# Altium PCB first_test.PcbDoc (part 4 of 5)
Units mil, origin at the board's own origin, x right, y up, seen from the top; angles counter-clockwise.
Board outline 3440.59 x 3087.6 mil, 4 copper layers (Top Layer, GND, VCC, Bottom Layer); 175 components, 91 nets, 2807 pads, 1128 vias.
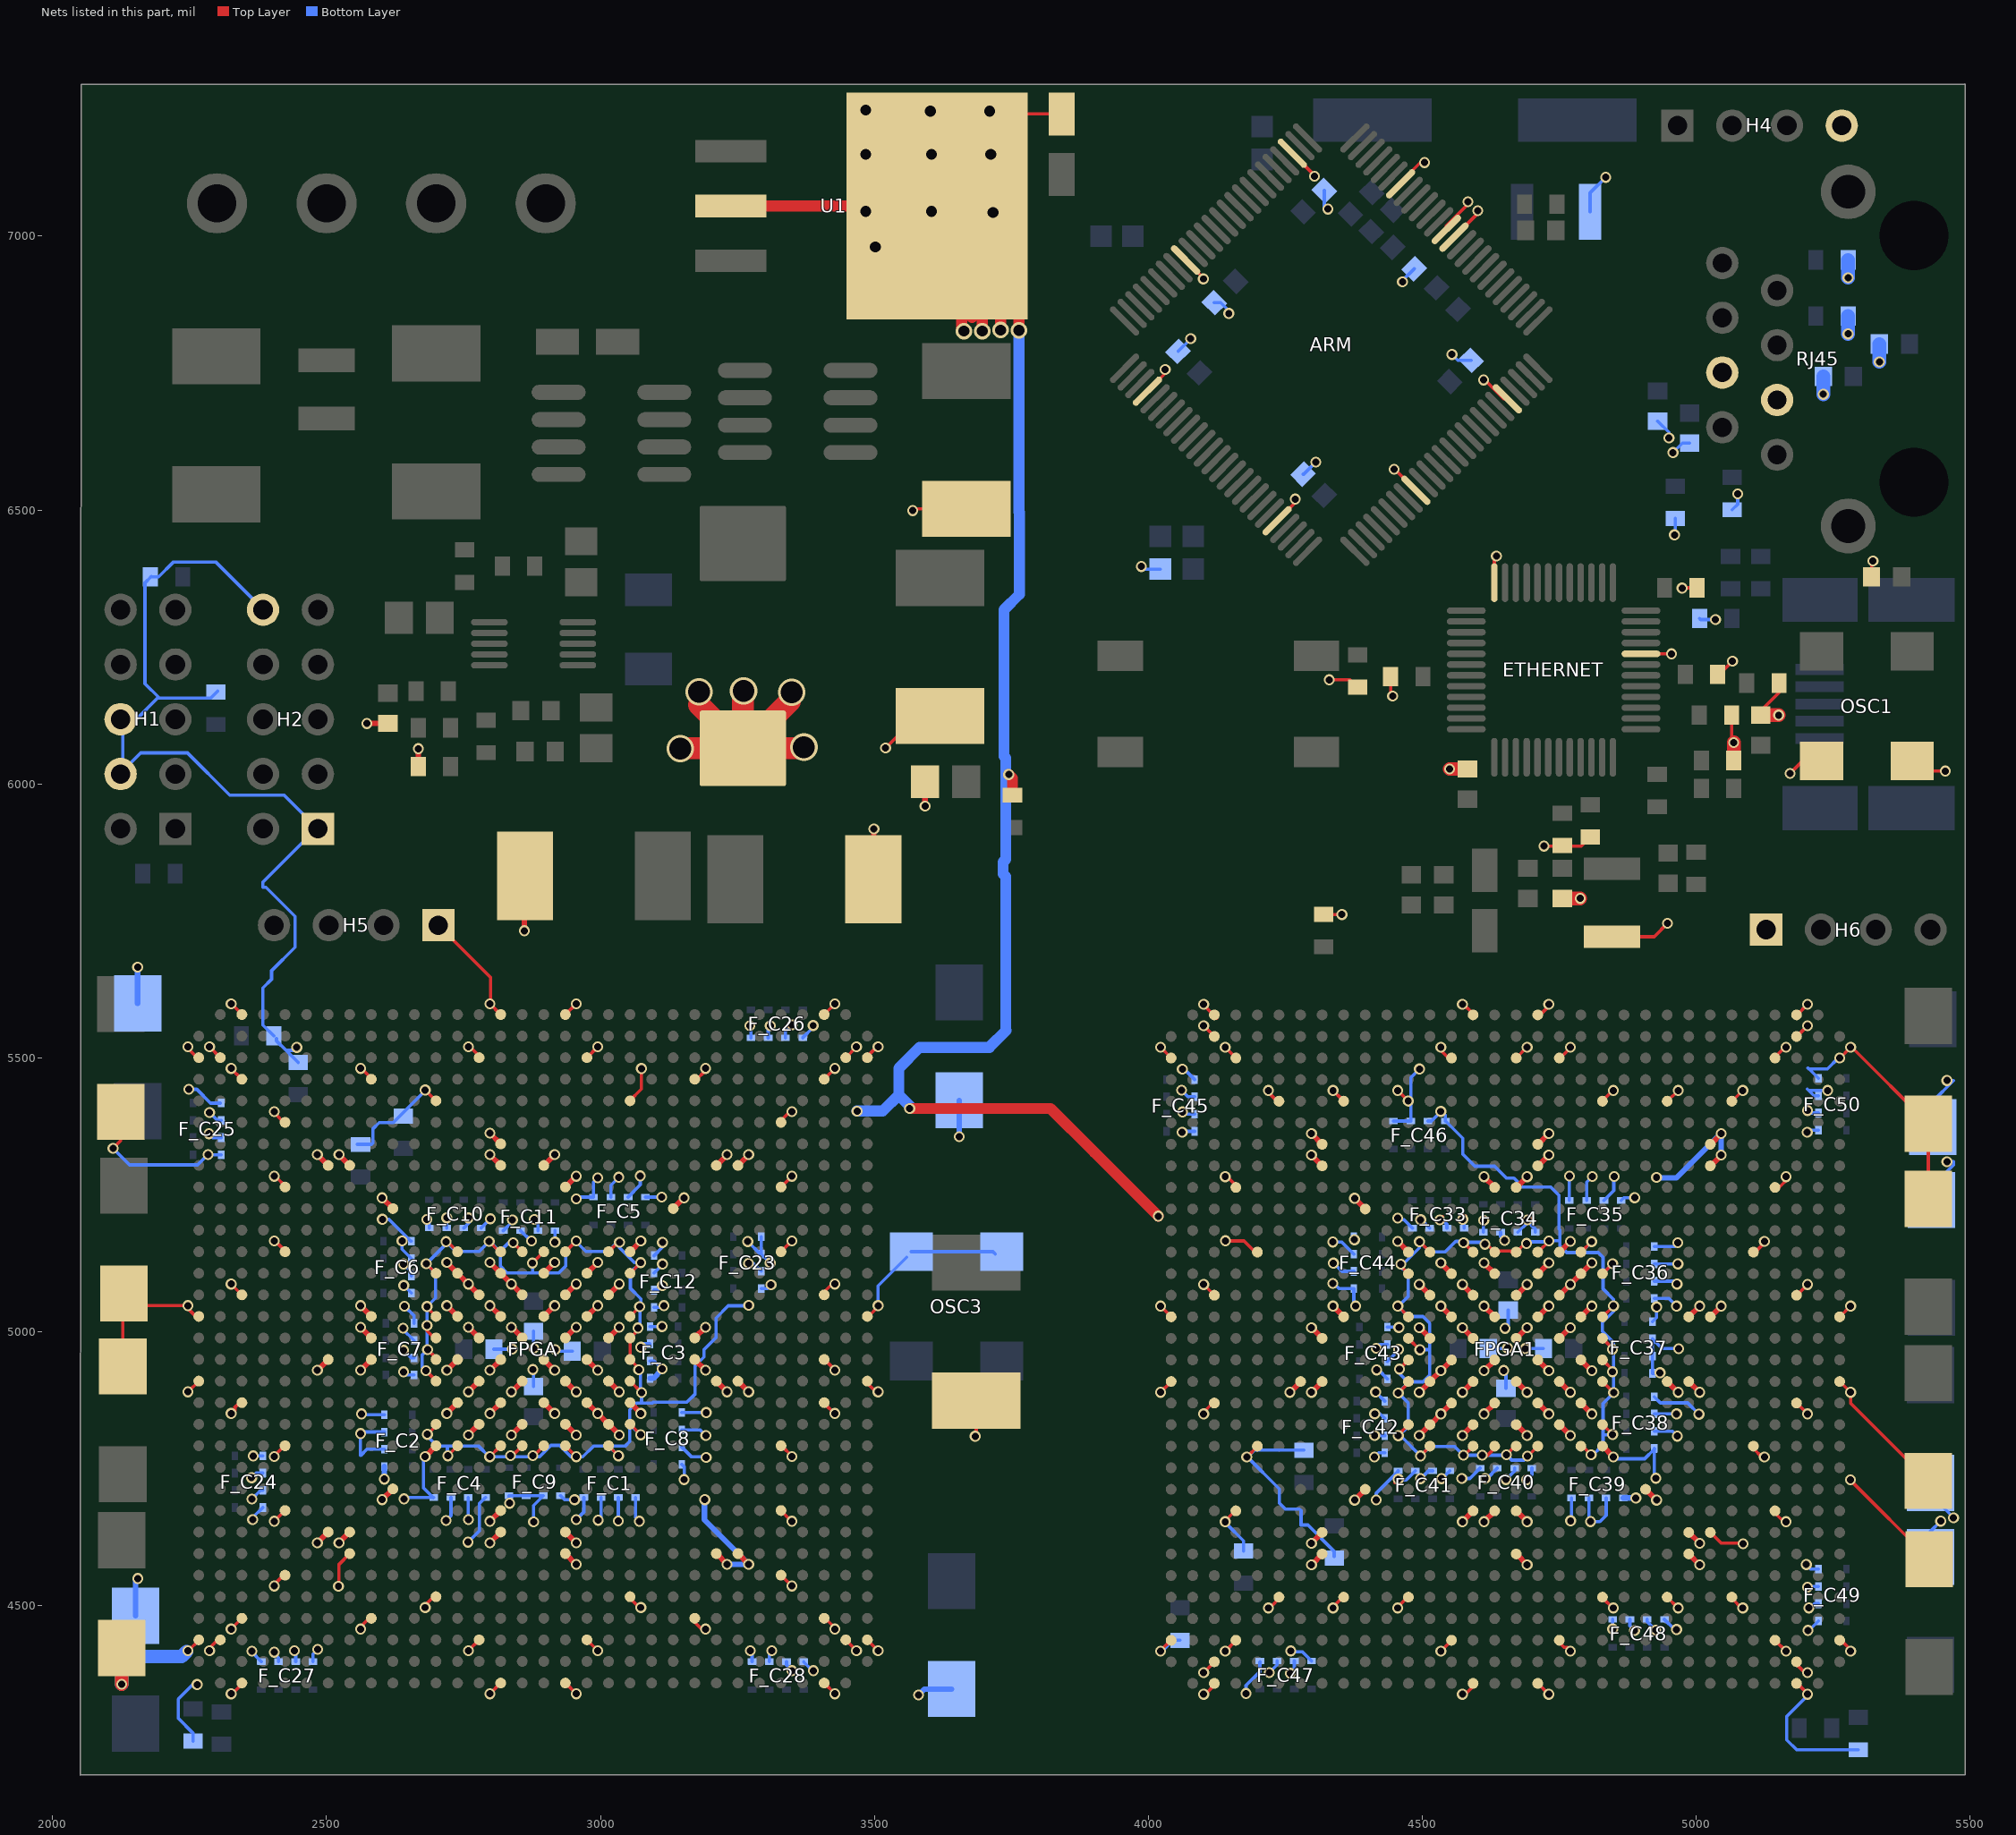
[diagram p6: the nets of this part, all layers, seen from the top]

## Via types
v1: diameter 20, hole 13, Top Layer to Bottom Layer, tented both sides, 907 vias
v2: diameter 20, hole 13, Top Layer to Bottom Layer, 189 vias
v3: diameter 30, hole 20, Top Layer to Bottom Layer, 14 vias
v4: diameter 40, hole 30, Top Layer to Bottom Layer, 12 vias
v5: diameter 50, hole 40, Top Layer to Bottom Layer, 5 vias
v6: diameter 25, hole 20, Top Layer to Bottom Layer, 1 vias

## Nets (pads, with @x,y where several pads share a name; then routed paths per layer and width w, separated by ;. In a path a pad name is that pad's centre, name@x,y a point inside that pad or via, vN(x,y) a via of type N, cw(c..) or ccw(c..) an arc to the next point about the centre after c; other vN are vias at no path point) (continued)
VCCINT: C5.1 C6.2 C8.1 F_60.1 F_C1.1 F_C1.2 F_C1.3 F_C1.4 F_C2.1 F_C2.2 F_C2.3 F_C2.4 F_C3.1 F_C3.2 F_C3.3 F_C3.4 F_C4.1 F_C4.2 F_C4.3 F_C4.4 F_C5.1 F_C5.2 F_C5.3 F_C5.4 F_C6.1 F_C6.2 F_C6.3 F_C6.4 F_C7.1 F_C7.2 F_C7.3 F_C7.4 F_C8.1 F_C8.2 F_C8.3 F_C8.4 F_C9.1 F_C9.2 F_C9.3 F_C9.4 F_C10.1 F_C10.2 F_C10.3 F_C10.4 F_C11.1 F_C11.2 F_C11.3 F_C11.4 F_C12.1 F_C12.2 F_C12.3 F_C12.4 F_C13.1 F_C14.1 F_C15.1 F_C16.1 F_C17.1 F_C18.1 F_C29.1 F_C30.1 F_C31.1 F_C32.1 F_C33.1 F_C33.2 F_C33.3 F_C33.4 F_C34.1 F_C34.2 F_C34.3 F_C34.4 F_C35.1 F_C35.2 F_C35.3 F_C35.4 F_C36.1 F_C36.2 F_C36.3 F_C36.4 F_C37.1 F_C37.2 F_C37.3 F_C37.4 F_C38.1 F_C38.2 F_C38.3 F_C38.4 F_C39.1 F_C39.2 F_C39.3 F_C39.4 F_C40.1 F_C40.2 F_C40.3 F_C40.4 F_C41.1 F_C41.2 F_C41.3 F_C41.4 F_C42.1 F_C42.2 F_C42.3 F_C42.4 F_C43.1 F_C43.2 F_C43.3 F_C43.4 F_C44.1 F_C44.2 F_C44.3 F_C44.4 F_C51.1 F_C52.1 F_C53.1 F_C54.1 F_C55.1 F_C56.1 F_C58.1 F_C59.1 F_C61.1 FPGA1.AA12 FPGA1.AC10 FPGA1.AD15 FPGA1.AE7 FPGA1.AE8 FPGA1.AE15 FPGA1.AE18 FPGA1.AF18 FPGA1.AF25 FPGA1.AF26 FPGA1.G15 FPGA1.H7 FPGA1.H8 FPGA1.H15 FPGA1.H17 FPGA1.H25 FPGA1.H26 FPGA1.J18 FPGA1.K10 FPGA1.K23 FPGA1.M21 FPGA1.N13 FPGA1.N15 FPGA1.N17 FPGA1.N19 FPGA1.P14 FPGA1.P16 FPGA1.P18 FPGA1.P20 FPGA1.R9 FPGA1.R13 FPGA1.R15 FPGA1.R17 FPGA1.R19 FPGA1.T9 FPGA1.T14 FPGA1.T16 FPGA1.T18 FPGA1.T20 FPGA1.T24 FPGA1.U7 FPGA1.U9 FPGA1.U13 FPGA1.U15 FPGA1.U17 FPGA1.U19 FPGA1.U24 FPGA1.V14 FPGA1.V16 FPGA1.V18 FPGA1.V20 FPGA1.V25 FPGA1.V26 FPGA1.W13 FPGA1.W15 FPGA1.W17 FPGA1.W19 FPGA1.W21 FPGA1.Y14 FPGA1.Y16 FPGA1.Y18 FPGA1.Y20 FPGA.AA12 FPGA.AC10 FPGA.AD15 FPGA.AE7 FPGA.AE8 FPGA.AE15 FPGA.AE18 FPGA.AF18 FPGA.AF25 FPGA.AF26 FPGA.G15 FPGA.H7 FPGA.H8 FPGA.H15 FPGA.H17 FPGA.H25 FPGA.H26 FPGA.J18 FPGA.K10 FPGA.K23 FPGA.M21 FPGA.N13 FPGA.N15 FPGA.N17 FPGA.N19 FPGA.P14 FPGA.P16 FPGA.P18 FPGA.P20 FPGA.R9 FPGA.R13 FPGA.R15 FPGA.R17 FPGA.R19 FPGA.T9 FPGA.T14 FPGA.T16 FPGA.T18 FPGA.T20 FPGA.T24 FPGA.U7 FPGA.U9 FPGA.U13 FPGA.U15 FPGA.U17 FPGA.U19 FPGA.U24 FPGA.V14 FPGA.V16 FPGA.V18 FPGA.V20 FPGA.V25 FPGA.V26 FPGA.W13 FPGA.W15 FPGA.W17 FPGA.W19 FPGA.W21 FPGA.Y14 FPGA.Y16 FPGA.Y18 FPGA.Y20 L1.2 R2.2 | length 9986.5
  Top Layer w6: v1@2560.04,4811.67 v1(2562.14,4813.77) ; v1@2632.9,5170.5 v1(2637.86,5165.54) ; v1@2636.76,4926.51 v1(2640.67,4926.51) ; v1@2638.54,5007.42 v1(2639.84,5006.12) ; v1@2638.99,4965.88 v1(2640.67,4965.88) ; v1(2682.82,5204.94) v1@2682.82,5207.47 ; v1(2719.41,5207.75) v1@2719.41,5211.97 ; v1(2758.75,4656.53) v1@2759.17,4656.1 ; v1(2758.87,5207.62) v1@2758.87,5209.68 ; v1(2833.92,4686.71) 2834.72,4685.91 2834.72,4684.9 2832.11,4684.9 v1@2835.55,4681.46 ; v1(2839.28,5203.87) v1@2840.75,5205.34 ; v1(2874.07,5165.55) v1@2874.15,5165.47 ; v1@2912.09,4972.36 v1(2917.41,4967.04) ; v1@2916.86,5162.57 v1(2916.86,5163.37) ; v1(2952.83,4693.09) v1@2954.65,4691.28 ; v1@2954.81,4655.71 v1(2955.63,4656.53) ; v1(2995,5280.84) v1@2995.64,5280.84 ; v1(2995.86,4655.66) v1@2997.76,4657.56 ; v1(3033.41,5281.85) v1@3033.73,5282.17 ; v1@3070.95,4653.3 v1(3070.95,4653.73) ; v1@3071.65,4971.49 v1(3073.71,4971.49) ; v1(3112.76,4931.78) v1@3115.71,4928.83 ; v1(3113.11,5084.02) v1@3118.74,5084.02 ; v1(3113.11,5123.38) v1@3118.1,5123.38 ; v1(3113.11,5162.74) v1@3113.11,5163.62 ; v1(3115.91,5047.46) v1@3118.29,5047.46 ; v2@3518.5,6063.5 v2(3520.5,6065.5) 3579.02,6124.02 C5.1@3620,6124.02 ; v2(3570,6499) 3573.02,6502.02 F_60.1@3668,6502.02 F_60.1@3668,6547 ; v2(3684,4809) 3686,4811 F_C61.1@3686,4874.02 ; v1(4337,5088) 4337,5089.06 4337.1,5089.06 4340.16,5086 v1@4340.16,5086.64 ; v1(4338,5125) 4338.56,5125 v1@4338.83,5124.73 ; v1@4409.03,4810.41 v1(4413.25,4810.41) ; v1@4411.32,4849.87 v1(4413.38,4849.87) ; v1@4415.66,4931.75 v1@4417.13,4930.28 ; v1@4450.5,4723.9 v1@4455.46,4728.86 ; v1(4455.15,5207.04) 4455.15,5207.15 4458,5207.15 4458,5204.37 4458.26,5204.11 v1@4457.38,5204.11 ; v1(4497.34,5204.22) 4497.51,5204.22 4497.62,5204.11 v1@4497.62,5209.1 ; v1(4532,5204) 4532,5207 4534.09,5207 4536.98,5204.11 v1@4536.98,5209.74 ; v1@4573.54,5209.29 4573.54,5206.91 4577.64,5211 4579.2,5211 4579.6,5210.6 v1(4574,5205) ; v1(4807.23,4653.14) v1@4809.33,4651.04 ; v1@4927.91,5043.83 v1@4929.72,5045.65 ; v1(4934.29,4924.92) 4935.09,4925.72 4936.1,4925.72 4936.1,4923.11 v1@4939.54,4926.55 ; v1@4963.44,5088.76 v1(4965.34,5086.86) ; v1(4964.47,4849.75) v1@4964.9,4850.17 ; v1(4964.47,5046.63) v1@4965.29,5045.81 ; v1@4967.27,5161.95 v1@4967.7,5161.95
  Top Layer w10: v1(2483.19,4614.37) FPGA.AE7@2502.87,4634.06 ; v1(2483.19,4929.33) FPGA.U7@2502.87,4949.02 ; v1(2483.19,5323.03) FPGA.H7@2502.87,5303.35 ; v1(2522.56,4614.37) FPGA.AE8@2542.24,4634.06 ; v1(2522.56,5323.03) FPGA.H8@2542.24,5303.35 ; v1(2561.93,4929.33) FPGA.U9@2581.61,4949.02 ; v1(2561.93,5008.07) FPGA.T9@2581.61,4988.39 ; v1(2561.93,5047.44) FPGA.R9@2581.61,5027.76 ; v2(2573.58,6110.24) C8.1@2606.3,6110.24 ; v1(2601.3,4693.11) FPGA.AC10@2620.98,4712.8 ; v1(2601.3,5244.29) FPGA.K10@2620.98,5224.61 ; R2.2@2667.32,6031.5 v2(2667.32,6064.21) ; v1(2680.04,4771.85) FPGA.AA12@2699.72,4791.54 ; v1(2719.41,4850.59) FPGA.W13@2739.09,4870.28 ; v1(2719.41,4929.33) FPGA.U13@2739.09,4949.02 ; v1(2719.41,5047.44) FPGA.R13@2739.09,5027.76 ; v1(2719.41,5126.18) FPGA.N13@2739.09,5106.5 ; FPGA.N13@2738.39,5104.29 2741.3,5104.29 v1(2758.78,5086.81) FPGA.P14@2778.46,5067.13 ; v1(2758.78,4811.22) FPGA.Y14@2778.46,4830.91 ; v1(2758.78,4889.96) FPGA.V14@2778.46,4909.65 ; v1(2758.78,5008.07) FPGA.T14@2778.46,4988.39 ; v1(2798.15,4614.37) FPGA.AE15@2817.83,4634.06 ; v1(2798.15,4653.74) FPGA.AD15@2817.83,4673.43 ; v1(2798.15,4850.59) FPGA.W15@2817.83,4870.28 ; v1(2798.15,4929.33) FPGA.U15@2817.83,4949.02 ; v1(2798.15,5047.44) FPGA.R15@2817.83,5027.76 ; v1(2798.15,5126.18) FPGA.N15@2817.83,5106.5 ; v1(2798.15,5323.03) FPGA.H15@2817.83,5303.35 ; v1(2798.15,5362.4) FPGA.G15@2817.83,5342.72 ; FPGA.N15@2818.23,5103.62 2820.71,5103.62 v1(2837.52,5086.81) FPGA.P16@2857.21,5067.13 ; v1(2837.52,4811.22) FPGA.Y16@2857.21,4830.91 ; v1(2837.52,4889.96) FPGA.V16@2857.21,4909.65 ; v1(2837.52,5008.07) FPGA.T16@2857.21,4988.39 ; v2(2861.09,5731.88) 2861.09,5740.14 F_C17.1@2861.09,5827.59 ; FPGA.W17@2896.58,4870.28 v1(2916.26,4850.59) ; FPGA.U17@2896.58,4949.02 v1(2916.26,4929.33) ; FPGA.R17@2896.58,5027.76 v1(2916.26,5047.44) ; FPGA.N17@2896.58,5106.5 v1(2916.26,5126.18) ; FPGA.H17@2896.58,5303.35 v1(2916.26,5323.03) ; FPGA.AF18@2935.95,4594.69 v1(2955.63,4575) ; FPGA.AE18@2935.95,4634.06 v1(2955.63,4614.37) ; FPGA.Y18@2935.95,4830.91 v1(2955.63,4811.22) ; FPGA.V18@2935.95,4909.65 v1(2955.63,4889.96) ; FPGA.T18@2935.95,4988.39 v1(2955.63,5008.07) ; FPGA.P18@2935.95,5067.13 v1(2955.63,5086.81) ; FPGA.J18@2935.95,5263.98 v1(2955.63,5283.66) ; FPGA.W19@2975.32,4870.28 v1(2995,4850.59) 3013.35,4832.24 FPGA.Y20@3013.35,4830.16 ; FPGA.U19@2975.32,4949.02 v1(2995,4929.33) ; FPGA.R19@2975.32,5027.76 v1(2995,5047.44) ; FPGA.N19@2975.32,5106.5 v1(2995,5126.18) ; FPGA.Y20@3014.69,4830.91 v1(3034.37,4811.22) ; FPGA.V20@3014.69,4909.65 v1(3034.37,4889.96) ; FPGA.T20@3014.69,4988.39 v1(3034.37,5008.07) ; FPGA.P20@3014.69,5067.13 v1(3034.37,5086.81) ; FPGA.W21@3054.06,4870.28 v1(3073.74,4850.59) ; FPGA.M21@3054.06,5145.87 v1(3073.74,5165.55) ; FPGA.K23@3132.8,5224.61 v1(3152.48,5244.29) ; FPGA.U24@3172.17,4949.02 v1(3191.85,4929.33) ; FPGA.T24@3172.17,4988.39 v1(3191.85,5008.07) ; FPGA.AF25@3211.54,4594.69 v1(3231.22,4575) ; FPGA.V25@3211.54,4909.65 v1(3231.22,4889.96) ; FPGA.H25@3211.54,5303.35 v1(3231.22,5323.03) ; FPGA.AF26@3250.91,4594.69 v1(3270.59,4575) ; FPGA.V26@3250.91,4909.65 v1(3270.59,4889.96) ; FPGA.H26@3250.91,5303.35 v1(3270.59,5323.03) ; F_C18.1@3499.14,5822.24 3499.14,5909.69 v2(3499.14,5917.95) ; v2(3592.52,5959.41) C6.2@3592.52,6003.94 ; v1(4258.6,4889.15) FPGA1.G15@4278.28,4908.83 ; v1(4297.97,4574.19) FPGA1.H7@4317.65,4593.87 ; v1(4297.97,4613.56) FPGA1.H8@4317.65,4633.24 ; v1(4297.97,4889.15) FPGA1.H15@4317.65,4908.83 ; v1(4297.97,5007.26) FPGA1.H17@4317.65,4987.58 ; v1(4297.97,5322.22) FPGA1.H25@4317.65,5302.54 ; v1(4297.97,5361.59) FPGA1.H26@4317.65,5341.91 ; v1(4337.34,5046.63) FPGA1.J18@4357.02,5026.95 ; v1(4376.71,4692.3) FPGA1.K10@4396.39,4711.98 ; v1(4376.71,5243.48) FPGA1.K23@4396.39,5223.8 ; v1(4455.45,5164.74) FPGA1.M21@4475.13,5145.06 ; v1(4494.82,4810.41) FPGA1.N13@4514.5,4830.09 ; v1(4494.82,4889.15) FPGA1.N15@4514.5,4908.83 ; v1(4494.82,5007.26) FPGA1.N17@4514.5,4987.58 ; v1(4494.82,5086) FPGA1.N19@4514.5,5066.32 ; FPGA1.N13@4516.71,4829.39 4516.71,4832.3 v1(4534.19,4849.78) FPGA1.P14@4553.87,4869.46 ; FPGA1.N15@4517.38,4909.23 4517.38,4911.71 v1(4534.19,4928.52) FPGA1.P16@4553.87,4948.21 ; v1(4534.19,5046.63) FPGA1.P18@4553.87,5026.95 ; v1(4534.19,5125.37) FPGA1.P20@4553.87,5105.69 ; v1(4573.56,4652.93) FPGA1.R9@4593.24,4672.61 ; v1(4573.56,4810.41) FPGA1.R13@4593.24,4830.09 ; v1(4573.56,4889.15) FPGA1.R15@4593.24,4908.83 ; v1(4573.56,5007.26) FPGA1.R17@4593.24,4987.58 ; v1(4573.56,5086) FPGA1.R19@4593.24,5066.32 ; v1(4612.93,4652.93) FPGA1.T9@4632.61,4672.61 ; v1(4612.93,4849.78) FPGA1.T14@4632.61,4869.46 ; v1(4612.93,4928.52) FPGA1.T16@4632.61,4948.21 ; v1(4612.93,5046.63) FPGA1.T18@4632.61,5026.95 ; v1(4612.93,5125.37) FPGA1.T20@4632.61,5105.69 ; v1(4612.93,5282.85) FPGA1.T24@4632.61,5263.17 ; FPGA1.U7@4671.98,4593.87 v1(4691.67,4574.19) ; FPGA1.U9@4671.98,4672.61 v1(4691.67,4652.93) ; FPGA1.U13@4671.98,4830.09 v1(4691.67,4810.41) ; FPGA1.U15@4671.98,4908.83 v1(4691.67,4889.15) ; FPGA1.U17@4671.98,4987.58 v1(4691.67,5007.26) ; FPGA1.U19@4671.98,5066.32 v1(4691.67,5086) ; FPGA1.U24@4671.98,5263.17 v1(4691.67,5282.85) ; FPGA1.V14@4711.35,4869.46 v1(4731.04,4849.78) ; FPGA1.V16@4711.35,4948.21 v1(4731.04,4928.52) ; FPGA1.V18@4711.35,5026.95 v1(4731.04,5046.63) ; FPGA1.V20@4711.35,5105.69 v1(4731.04,5125.37) ; FPGA1.V25@4711.35,5302.54 v1(4731.04,5322.22) ; FPGA1.V26@4711.35,5341.91 v1(4731.04,5361.59) ; FPGA1.W13@4750.72,4830.09 v1(4770.41,4810.41) ; FPGA1.W15@4750.72,4908.83 v1(4770.41,4889.15) ; FPGA1.W17@4750.72,4987.58 v1(4770.41,5007.26) ; FPGA1.W19@4750.72,5066.32 v1(4770.41,5086) 4788.76,5104.35 FPGA1.Y20@4790.84,5104.35 ; FPGA1.W21@4750.72,5145.06 v1(4770.41,5164.74) ; FPGA1.Y14@4790.09,4869.46 v1(4809.78,4849.78) ; FPGA1.Y16@4790.09,4948.21 v1(4809.78,4928.52) ; FPGA1.Y18@4790.09,5026.95 v1(4809.78,5046.63) ; FPGA1.Y20@4790.09,5105.69 v1(4809.78,5125.37) ; FPGA1.AA12@4829.46,4790.72 v1(4849.15,4771.04) ; FPGA1.AC10@4908.2,4711.98 v1(4927.89,4692.3) ; FPGA1.AD15@4947.57,4908.83 v1(4967.26,4889.15) ; FPGA1.AE7@4986.94,4593.87 v1(5006.63,4574.19) ; FPGA1.AE8@4986.94,4633.24 v1(5006.63,4613.56) ; FPGA1.AE15@4986.94,4908.83 v1(5006.63,4889.15) ; FPGA1.AE18@4986.94,5026.95 v1(5006.63,5046.63) ; FPGA1.AF18@5026.31,5026.95 v1(5046,5046.63) ; FPGA1.AF25@5026.31,5302.54 v1(5046,5322.22) ; FPGA1.AF26@5026.31,5341.91 v1(5046,5361.59)
  Top Layer w40: v5@3146.38,6064.96 L1.2@3259.84,6064.96 ; v5@3180.2,6144.61 L1.2@3259.84,6064.96 ; v5@3259.84,6169.17 L1.2@3259.84,6064.96 ; v5@3346.14,6151.26 L1.2@3259.84,6064.96 ; v5@3370.12,6064.96 L1.2@3259.84,6064.96
  Bottom Layer w6: v1@2561.95,4808.42 2561.95,4773.68 2573.45,4785.18 F_C2.3@2605.3,4785.18 ; v1(2562.14,4813.77) 2565.05,4816.68 F_C2.2@2605.3,4816.68 ; v1(2563.88,4849.75) 2565.45,4848.17 F_C2.1@2605.3,4848.17 ; v1(2601.77,5205) 2613.72,5205 2653.82,5164.9 F_C6.4@2654.75,5164.9 ; v1(2637.86,5165.54) 2637.86,5150.29 F_C6.3@2654.75,5133.4 ; v1(2639.84,5006.12) 2639.84,5003.5 F_C7.3@2659.59,4983.75 ; v1(2640.67,4926.51) 2646.42,4920.76 F_C7.1@2659.59,4920.76 ; v1(2640.67,4965.88) 2654.29,4952.25 F_C7.2@2659.59,4952.25 ; v1(2640.67,5123.36) 2654.75,5109.28 F_C6.2@2654.75,5101.91 ; v1(2640.9,5084.25) F_C6.1@2654.75,5070.41 ; v1(2641.3,4694.61) 2644.03,4697.34 F_C4.1@2694.24,4697.34 ; v1(2642.32,5046.31) 2659.59,5029.04 F_C7.4@2659.59,5015.24 ; v1@2676.77,4768.58 2676.77,4714.8 F_C4.1@2694.24,4697.34 ; v1(2682.82,5204.94) 2687.65,5200.12 F_C10.1@2687.65,5189.34 ; F_C4.1@2694.8,4696.77 F_C4.1@2694.24,4697.34 ; F_C4.1@2695.65,4697.34 F_C4.1@2694.24,4697.34 ; v1(2718.09,4655.19) 2727.14,4664.24 F_C4.2@2727.14,4697.34 ; F_C10.2@2719.14,5189.34 2719.14,5207.48 v1(2719.41,5207.75) ; F_C10.3@2750.64,5189.34 2759.88,5198.58 2759.88,5206.6 v1(2758.87,5207.62) ; v1(2758.23,4615.63) 2778.86,4636.26 2778.86,4686.06 F_C4.4@2790.13,4697.34 ; F_C4.3@2758.64,4697.34 2758.64,4656.64 v1(2758.75,4656.53) ; F_C10.4@2782.13,5189.34 v1(2798.82,5206.02) ; F_C29.1@2805.56,4968 2838.83,4968 v1(2838.98,4968.15) ; F_C11.1@2822.76,5184.41 2839.28,5200.94 v1(2839.28,5203.87) ; F_C9.1@2832.76,4700.41 2832.76,4685.54 2832.11,4684.9 2834.72,4684.9 2834.72,4685.91 v1(2833.92,4686.71) ; F_C9.1@2833.8,4700.41 F_C9.2@2864.25,4700.41 F_C9.3@2894.95,4700.41 ; F_C11.2@2854.25,5184.41 2873.11,5165.55 v1(2874.07,5165.55) ; v1(2876.61,4930.73) 2878,4932.12 F_C30.1@2878,4899.56 ; v1(2877.91,4652.64) 2877.91,4682.57 F_C9.3@2895.75,4700.41 ; v1(2878,4969.5) F_C31.1@2878,5000.44 ; v1(2879.35,5204.58) 2885.75,5198.19 F_C11.3@2885.75,5184.41 ; v1(2916.86,5163.37) 2917.24,5163.75 F_C11.4@2917.24,5184.41 ; v1(2917.41,4967.04) 2920.45,4964 F_C32.1@2948.44,4964 ; F_C9.4@2927.24,4700.41 2934.56,4693.09 v1(2952.83,4693.09) ; v1(2955.63,4656.53) 2969.64,4670.55 F_C1.1@2969.64,4697.34 ; v1(2955.71,5242.36) 2958.95,5245.61 F_C5.4@2987.43,5245.61 2987.43,5272.62 2995,5280.2 v1(2995,5280.84) ; v1(2995.86,4655.66) 3001.14,4660.94 F_C1.2@3001.14,4697.34 ; F_C5.3@3018.92,5245.61 3018.92,5267.35 v1(3033.41,5281.85) ; v1(3032.64,4654.1) F_C1.3@3032.64,4697.34 ; F_C5.2@3050.42,5245.61 3072.68,5267.87 v1(3072.68,5284.29) ; F_C1.4@3064.13,4697.34 3064.13,4660.55 v1(3070.95,4653.73) ; v1(3073.71,4971.49) 3079.97,4977.75 F_C3.2@3090.41,4977.75 ; F_C5.1@3081.91,5245.61 v1(3111.8,5245.61) ; F_C3.3@3090.41,4946.25 3098.28,4946.25 v1(3112.76,4931.78) ; F_C3.1@3090.41,5009.24 v1(3112.35,5009.24) ; F_C12.4@3097.91,5044.25 3112.71,5044.25 v1(3115.91,5047.46) ; F_C12.3@3097.91,5075.75 3104.84,5075.75 v1(3113.11,5084.02) ; F_C12.2@3097.91,5107.24 3113.11,5122.44 v1(3113.11,5123.38) ; F_C12.1@3097.91,5138.74 3113.11,5153.94 v1(3113.11,5162.74) ; F_C8.1@3148.48,4757.68 3153.19,4752.98 3153.19,4730.41 v1(3152.59,4729.81) ; F_C8.2@3148.48,4789.18 3166.44,4771.22 3192.03,4771.22 v1(3193.02,4770.24) ; F_C8.3@3148.48,4820.68 3181.96,4820.68 v1(3192.28,4810.35) ; F_C8.4@3148.48,4852.17 v1(3193.06,4852.17) ; v1(4336.71,5163.68) 4353.13,5163.68 F_C44.2@4375.39,5141.42 ; v1(4337,5088) 4337,5089.06 4337.1,5089.06 4340.16,5086 4340.8,5086 4348.38,5078.43 F_C44.4@4375.39,5078.43 4375.39,5049.95 v1(4378.64,5046.71) ; v1(4338,5125) 4338.56,5125 4339.15,5124.41 4353.65,5109.92 F_C44.3@4375.39,5109.92 ; F_C44.1@4375.39,5172.91 4376.41,5171.9 v1(4376.41,5167.67) ; v1(4412.96,4771.15) 4420.45,4778.65 F_C42.1@4431.66,4778.65 ; v1(4413.25,4810.41) 4413.52,4810.14 F_C42.2@4431.66,4810.14 ; v1(4413.38,4849.87) 4414.4,4850.88 4422.42,4850.88 F_C42.3@4431.66,4841.64 ; v1(4414.98,4889.82) F_C42.4@4431.66,4873.13 ; v1(4416,4692.77) 4416,4704.72 4456.1,4744.82 F_C41.4@4456.1,4745.75 ; v1@4416.42,4970.35 4422.81,4976.75 F_C43.3@4436.59,4976.75 ; v1@4417.13,4930.28 4420.06,4930.28 F_C43.1@4436.59,4913.76 ; F_C43.2@4436.59,4945.25 4457,4965.66 v1(4457,4967.5) ; F_C43.4@4436.59,5008.24 4456.76,5008.24 v1(4457.5,5007.5) ; v1(4455.15,5207.04) 4455.15,5207.15 4458,5207.15 4458,5204.37 4458.26,5204.11 4467.06,5204.11 F_C33.1@4482.26,5188.91 ; v1@4455.46,4728.86 4470.71,4728.86 F_C41.3@4487.6,4745.75 ; v1(4497.34,5204.22) 4497.51,5204.22 4497.62,5204.11 4498.56,5204.11 F_C33.2@4513.76,5188.91 ; v1@4497.64,4731.67 4511.72,4745.75 F_C41.2@4519.09,4745.75 ; v1(4532,5204) 4532,5207 4534.09,5207 4545.25,5195.84 F_C33.3@4545.25,5188.91 ; v1@4536.75,4731.9 F_C41.1@4550.59,4745.75 ; v1(4572.5,4732) 4587.16,4732 F_C40.4@4605.76,4750.59 ; v1(4574,5205) 4575.27,5206.27 4575.27,5206.91 4573.54,5206.91 4576.75,5203.71 F_C33.4@4576.75,5188.91 ; F_C34.1@4611.76,5181.41 4611.76,5202.26 v1(4612.5,5203) ; v1(4615,4732) 4618.66,4732 F_C40.3@4637.25,4750.59 ; F_C54.1@4620.56,4969 4655,4969 v1(4656,4970) ; F_C34.2@4643.25,5181.41 4643.25,5173.25 4650.5,5166 4650.63,5166.13 v1(4650.63,5166.31) ; v1(4649,4929) 4653,4925 F_C53.1@4653,4896.56 ; v1(4651.5,5006) 4657,5011.5 F_C51.1@4657,5039.44 ; v1(4653,4730) 4668.75,4745.75 F_C40.2@4668.75,4750.59 ; F_C34.3@4674.75,5181.41 4692,5198.66 v1@4692,5202 ; v1(4688,4969) F_C52.1@4721.44,4969 ; v1(4691,4729.5) 4700.24,4738.74 F_C40.1@4700.24,4750.59 ; v1@4691,5203 v1@4692,5202 ; v1(4692,5204) v1@4692,5202 ; F_C34.4@4706.24,5181.41 4706.24,5187.76 v1@4692,5202 ; F_C35.4@4768.83,5239.48 v1(4768.83,5284.06) ; v1@4771.25,4654.88 4772.83,4656.45 F_C39.1@4772.83,4696.3 ; F_C35.3@4800.32,5239.48 4800.32,5272.96 v1(4810.65,5283.28) ; F_C39.2@4804.32,4696.3 4804.32,4656.05 v1(4807.23,4653.14) ; v1@4812.58,4652.95 4824.32,4652.95 4835.82,4664.45 F_C39.3@4835.82,4696.3 ; F_C35.2@4831.82,5239.48 4849.78,5257.44 4849.78,5283.03 v1@4850.76,5284.02 ; v1@4852.42,4767.77 4906.2,4767.77 F_C38.1@4923.66,4785.24 ; F_C35.1@4863.32,5239.48 4868.02,5244.19 4890.59,5244.19 v1@4891.19,5243.59 ; F_C37.1@4920.59,4923.76 4935.46,4923.76 4936.1,4923.11 4936.1,4925.72 4935.09,4925.72 v1(4934.29,4924.92) ; F_C37.1@4920.59,4924.8 F_C37.2@4920.59,4955.25 F_C37.3@4920.59,4985.95 ; F_C37.3@4920.59,4986.75 4938.43,4968.91 v1(4968.36,4968.91) ; F_C37.4@4920.59,5018.24 4927.91,5025.56 v1@4927.91,5043.83 ; F_C38.1@4923.66,4786.65 F_C38.1@4923.66,4785.24 ; F_C38.2@4923.66,4818.14 4956.76,4818.14 v1(4965.81,4809.09) ; F_C38.3@4923.66,4849.64 4964.36,4849.64 v1(4964.47,4849.75) ; F_C38.4@4923.66,4881.13 4934.94,4869.86 4984.74,4869.86 v1(5005.37,4849.23) ; F_C36.1@4923.66,5060.64 4950.45,5060.64 v1(4964.47,5046.63) ; F_C36.2@4923.66,5092.14 4960.06,5092.14 v1(4965.34,5086.86) ; F_C36.3@4923.66,5123.64 v1(4966.9,5123.64) ; F_C36.4@4923.66,5155.13 4960.45,5155.13 v1@4967.27,5161.95 ; F_C38.1@4924.23,4785.8 F_C38.1@4923.66,4785.24 ; v1(4926.39,4732.3) 4923.66,4735.03 F_C38.1@4923.66,4785.24 ; F_C59.1@5428,4588.43 5428,4635.5 v2(5446.5,4654) ; F_C58.1@5428,4723.57 5428,4702.5 5470,4660.5 v2(5470,4660) ; F_C56.1@5430,5240.43 5430,5264.5 5470,5304.5 5470,5310 v2(5458,5310) ; F_C55.1@5432,5373.57 5432,5420.5 5470,5458.5 v2(5458,5458.5)
  Bottom Layer w10: F_C13.1@2151.06,4481.26 2151.06,4539.19 v2@2151.06,4547.44 ; F_C15.1@2155,5599.37 v2(2155,5665.55) ; v1(2605.3,4730.81) 2605.3,4739.07 F_C2.4@2605.3,4753.68 ; v1@2676.77,4768.58 v1(2680.04,4771.85) ; F_C3.4@3090.41,4914.76 3096.37,4914.76 v1@3111.26,4929.65 ; v1(3190.51,4693.19) 3189.88,4692.56 3189.88,4656.61 3271.5,4575 v1(3231.22,4575) ; v2(3580.71,4336.61) 3591.5,4347.4 F_C16.1@3641.22,4347.4 ; v2(3655,5356.02) 3655,5364.28 F_C14.1@3655,5422.21 ; v1(4849.15,4771.04) v1@4852.42,4767.77 ; F_C39.4@4867.32,4696.3 4881.93,4696.3 v1(4890.19,4696.3) ; v1(4927.81,5281.51) 4928.44,5280.88 4964.39,5280.88 5046,5362.5 v1(5046,5322.22)
  other v1: 4771,4654.5 4456.5,4730.5 4497,4731.5 4535.5,4731.5 4417,4930 4416,4969.5 4928,5045 4966.5,5162.5 4888,5244.5 4850.5,5283
  other v2: 2155.51,4549.21
  other v5: 3145.55,6064.45 3371.5,6067.17 3348.98,6167.36 3180.08,6168.11 3261.26,6169.69
VCCPD: A_C6.1 A_C7.1 A_C8.1 A_C9.1 A_C10.1 A_C11.1 A_C12.1 ARM.12 ARM.13 ARM.19 ARM.28 ARM.42 ARM.54 ARM.71 ARM.84 ARM.96 C12.1 C19.1 C20.1 C21.1 C26.2 C27.2 C28.1 C41.2 ETHERNET.32 ETHERNET.48 F_C19.1 F_C20.1 F_C21.1 F_C22.1 F_C23.1 F_C23.2 F_C23.3 F_C23.4 F_C24.1 F_C24.2 F_C24.3 F_C24.4 F_C25.1 F_C25.2 F_C25.3 F_C25.4 F_C26.1 F_C26.2 F_C26.3 F_C26.4 F_C27.1 F_C27.2 F_C27.3 F_C27.4 F_C28.1 F_C28.2 F_C28.3 F_C28.4 F_C45.1 F_C45.2 F_C45.3 F_C45.4 F_C46.1 F_C46.2 F_C46.3 F_C46.4 F_C47.1 F_C47.2 F_C47.3 F_C47.4 F_C48.1 F_C48.2 F_C48.3 F_C48.4 F_C49.1 F_C49.2 F_C49.3 F_C49.4 F_C50.1 F_C50.2 F_C50.3 F_C50.4 F_C62.1 F_C63.1 F_C64.1 F_C65.1 FPGA1.A3 FPGA1.A15 FPGA1.A18 FPGA1.A30 FPGA1.AA5 FPGA1.AA13 FPGA1.AA15 FPGA1.AA16 FPGA1.AA17 FPGA1.AA18 FPGA1.AA20 FPGA1.AA28 FPGA1.AD5 FPGA1.AD28 FPGA1.AF8 FPGA1.AG5 FPGA1.AG28 FPGA1.AH12 FPGA1.AH21 FPGA1.AJ3 FPGA1.AJ9 FPGA1.AJ24 FPGA1.AJ30 FPGA1.AK1 FPGA1.AK2 FPGA1.AK14 FPGA1.AK19 FPGA1.AK31 FPGA1.AK32 FPGA1.AM3 FPGA1.AM15 FPGA1.AM18 FPGA1.AM30 FPGA1.C1 FPGA1.C2 FPGA1.C14 FPGA1.C19 FPGA1.C31 FPGA1.C32 FPGA1.D3 FPGA1.D9 FPGA1.D24 FPGA1.D30 FPGA1.E12 FPGA1.E21 FPGA1.F5 FPGA1.F28 FPGA1.J5 FPGA1.J28 FPGA1.M5 FPGA1.M13 FPGA1.M15 FPGA1.M16 FPGA1.M17 FPGA1.M18 FPGA1.M20 FPGA1.M28 FPGA1.N12 FPGA1.N21 FPGA1.P3 FPGA1.P30 FPGA1.R1 FPGA1.R12 FPGA1.R21 FPGA1.R32 FPGA1.T12 FPGA1.T21 FPGA1.U12 FPGA1.U21 FPGA1.U30 FPGA1.V1 FPGA1.V12 FPGA1.V21 FPGA1.V32 FPGA1.W3 FPGA1.W30 FPGA1.Y12 FPGA1.Y21 FPGA.A3 FPGA.A15 FPGA.A18 FPGA.A30 FPGA.AA5 FPGA.AA13 FPGA.AA15 FPGA.AA16 FPGA.AA17 FPGA.AA18 FPGA.AA20 FPGA.AA28 FPGA.AD5 FPGA.AD28 FPGA.AF8 FPGA.AG5 FPGA.AG28 FPGA.AH12 FPGA.AH21 FPGA.AJ3 FPGA.AJ9 FPGA.AJ24 FPGA.AJ30 FPGA.AK1 FPGA.AK2 FPGA.AK14 FPGA.AK19 FPGA.AK31 FPGA.AK32 FPGA.AM3 FPGA.AM15 FPGA.AM18 FPGA.AM30 FPGA.C1 FPGA.C2 FPGA.C14 FPGA.C19 FPGA.C31 FPGA.C32 FPGA.D3 FPGA.D9 FPGA.D24 FPGA.D30 FPGA.E12 FPGA.E21 FPGA.F5 FPGA.F28 FPGA.J5 FPGA.J28 FPGA.M5 FPGA.M13 FPGA.M15 FPGA.M16 FPGA.M17 FPGA.M18 FPGA.M20 FPGA.M28 FPGA.N12 FPGA.N21 FPGA.P3 FPGA.P30 FPGA.R1 FPGA.R12 FPGA.R21 FPGA.R32 FPGA.T12 FPGA.T21 FPGA.U12 FPGA.U21 FPGA.U30 FPGA.V1 FPGA.V12 FPGA.V21 FPGA.V32 FPGA.W3 FPGA.W30 FPGA.Y12 FPGA.Y21 H1.4 H1.6 H2.1 H2.10 H4.4 H5.1 H6.1 L2.1 L4.1 OSC1.1 OSC1.4 OSC3.1 OSC3.4 R10.2 R13.2 R14.2 R15.2 R16.2 R19.1 R20.1 R21.1 R22.2 R23.1 R24.2 R33.1 R37.1 R38.1 R39.1 R40.1 R41.1 R42.2 R43.2 R44.1 R45.1 R49.2 R50.1 R51.2 R52.1 R53.1 R54.1 R55.1 RJ45.3 RJ45.4 U1.2 U1.4 VCC.1 | length 20736.1
  Top Layer w6: v2(2110.23,5334.64) 2124.03,5348.43 F_C20.1@2124.03,5401.02 ; F_C19.1@2128,4901.62 F_C19.1@2128,4936.43 2128,5051.23 F_C21.1@2133.86,5057.09 ; F_C21.1@2130,5057.09 F_C21.1@2130,5069.57 ; F_C21.1@2135.83,5043.31 2139.96,5047.44 v1(2246.97,5047.44) 2246.97,5042.17 FPGA.R1@2263.86,5025.28 ; v1(2246.97,5519.88) 2246.97,5516.97 FPGA.C1@2265.87,5498.07 ; v1@2247.36,4890.35 FPGA.V1@2266.65,4909.65 ; v1@2247.95,4417.68 2266.65,4436.38 FPGA.AK1@2266.65,4437.21 ; v1@2283.98,4420 2301.18,4437.21 FPGA.AK2@2306.02,4437.21 ; v1(2286.34,5519.88) 2305.63,5500.59 FPGA.C2@2307.32,5500.59 ; v1@2323.11,4455.24 2324.05,4455.24 v1(2325.71,4456.89) FPGA.AJ3@2345.39,4476.58 ; v1(2325.71,5086.81) 2345.28,5067.24 FPGA.P3@2346.26,5067.24 ; v1(2325.71,5480.51) 2325.71,5480.2 FPGA.D3@2344.76,5461.14 ; v1@2327.05,5598.19 2345.39,5579.84 FPGA.A3@2345.39,5578.94 ; v1@2330.94,4341.73 2345.39,4356.18 FPGA.AM3@2345.39,4358.47 ; v1@2332.67,4855.78 2332.67,4861.73 2341.22,4870.28 FPGA.W3@2345.39,4870.28 ; v1@2402.95,4536.65 2421.61,4555.32 FPGA.AG5@2424.13,4555.32 ; v1@2403.11,4771.73 2422.91,4791.54 FPGA.AA5@2424.13,4791.54 ; v1(2404.45,5165.55) 2406.22,5165.55 FPGA.M5@2424.13,5147.64 ; v1(2404.45,5283.66) 2406.45,5283.66 FPGA.J5@2426.69,5263.43 ; v1(2404.45,5401.77) 2404.45,5399.45 FPGA.F5@2424.65,5379.25 ; v1@2404.96,4653.15 2404.96,4654.25 FPGA.AD5@2424.13,4673.43 ; v1@2521.18,4534.57 2522.72,4536.1 2522.72,4575.16 ; 2522.72,4575 2522.72,4575.16 ; FPGA.AF8@2542.24,4594.69 2522.72,4575.16 ; v1@2558.7,4457.6 2577.68,4476.58 FPGA.AJ9@2581.61,4476.58 ; v1(2561.93,5480.51) 2563.58,5480.51 FPGA.D9@2580.91,5463.19 ; v1@2680.04,4500.63 2695.35,4515.95 FPGA.AH12@2699.72,4515.95 ; v1(2680.04,5441.14) 2680.04,5440.91 FPGA.E12@2700.24,5420.71 ; v1(2681.52,4928.62) FPGA.V12@2697.84,4912.2 ; v1(2681.93,5124.02) 2698.78,5107.17 FPGA.N12@2698.78,5104.92 ; v1@2683.39,5001.57 FPGA.T12@2697.32,4987.64 ; v1@2683.82,5043.66 FPGA.R12@2699.72,5027.76 ; v1(2684.12,4812.51) FPGA.Y12@2700.43,4828.82 ; v1(2684.33,4967.28) 2699.21,4952.4 FPGA.U12@2699.21,4948.82 ; H5.1@2704,5742 2799.21,5646.79 v1@2799.21,5597.56 ; v1@2719.41,5165.67 FPGA.M13@2738.66,5146.42 ; v1(2721.18,4773.27) FPGA.AA13@2738.15,4790.24 ; v1@2758.31,4418.46 2759.72,4418.46 FPGA.AK14@2778.46,4437.21 ; v1(2758.78,5519.88) 2761.89,5519.88 FPGA.C14@2776.1,5505.67 ; v1@2794.29,4339.41 2798.78,4339.41 FPGA.AM15@2817.83,4358.47 ; v1(2796.78,5164.61) FPGA.M15@2813.2,5148.19 ; v1(2797.83,4771.54) FPGA.AA15@2817.83,4791.54 ; v1(2798.15,5598.62) v1@2799.21,5597.56 ; v1@2799.21,5596.46 v1@2799.21,5597.56 ; FPGA.A15@2816.54,5581.38 2815.39,5581.38 v1@2799.21,5597.56 ; v1@2837.42,4771.75 FPGA.AA16@2857.21,4791.54 ; v1(2840.59,5162.48) FPGA.M16@2857.21,5145.87 ; v1(2875.83,5125.12) FPGA.M17@2896.58,5145.87 ; v1@2878.55,4773.51 FPGA.AA17@2896.58,4791.54 ; FPGA.M18@2935.75,5145.55 FPGA.M18@2936.06,5145.87 ; FPGA.AM18@2935.95,4358.47 2936.14,4358.47 v1@2956.38,4338.23 ; FPGA.AA18@2935.95,4791.54 v1(2955.83,4771.65) ; FPGA.M18@2935.95,5145.87 FPGA.M18@2936.06,5145.87 ; FPGA.A18@2936.5,5578.74 2936.5,5579.49 v1(2955.63,5598.62) ; FPGA.M18@2939.69,5145.87 FPGA.M18@2936.06,5145.87 ; v1(2955.63,5165.43) FPGA.M18@2936.06,5145.87 ; FPGA.C19@2974.53,5499.33 2974.53,5499.41 FPGA.C19@2975.32,5500.2 v1(2995,5519.88) ; FPGA.AK19@2975.32,4437.21 2991.34,4421.18 v1@2991.73,4421.18 ; FPGA.AA20@3013.35,4791.14 3014.95,4791.14 v1(3032.82,4773.27) ; FPGA.M20@3014.69,5145.87 v1@3031.61,5162.8 ; FPGA.T21@3051.81,4988.5 3054.06,4986.26 FPGA.U21@3054.06,4949.02 3069.89,4933.18 v1(3069.89,4930.52) ; FPGA.E21@3053.15,5421.26 3074.58,5442.69 3074.58,5480.1 v1(3074.8,5480.31) ; FPGA.AH21@3054.06,4515.95 3054.06,4512.95 v1@3072.8,4494.21 ; FPGA.Y21@3054.06,4830.91 v1(3073.35,4811.61) ; FPGA.V21@3054.06,4909.65 v1(3075.13,4888.56) ; FPGA.T21@3054.06,4988.39 v1@3068.47,5002.8 ; FPGA.R21@3054.06,5027.76 v1@3071.42,5045.12 ; FPGA.N21@3054.06,5106.5 v1@3073.37,5125.81 ; FPGA.AJ24@3172.17,4476.58 3172.17,4469.33 v1@3190.63,4450.87 ; FPGA.D24@3174.29,5459.37 3191.85,5476.93 v1(3191.85,5480.51) ; FPGA.J28@3327.24,5268.54 3334.21,5268.54 v1(3349.33,5283.66) ; FPGA.AG28@3329.65,4555.32 3347.87,4537.09 v1@3350.94,4537.09 ; FPGA.AD28@3329.65,4673.43 3338.62,4664.45 3338.62,4663.98 v1@3348.07,4654.53 ; FPGA.AA28@3329.65,4791.54 3330.59,4791.54 v1@3349.72,4772.4 ; FPGA.F28@3330.94,5387.01 3345.71,5401.77 v1(3349.33,5401.77) ; FPGA.M28@3332.91,5144.06 3332.91,5149.13 v1(3349.33,5165.55) ; FPGA.P30@3406.93,5071.3 3422.44,5086.81 v1(3428.07,5086.81) ; FPGA.AM30@3408.39,4358.47 v1(3428.07,4338.78) v1@3432.36,4334.49 ; FPGA.AJ30@3408.39,4476.58 3410.39,4476.58 v1@3431.77,4455.2 ; FPGA.W30@3408.39,4870.28 3408.39,4869.17 v1@3427.87,4849.69 ; FPGA.U30@3408.39,4949.02 3409.21,4949.02 v1@3429.41,4928.82 ; FPGA.A30@3410.16,5581.85 3411.3,5581.85 v1(3428.07,5598.62) ; FPGA.D30@3412.95,5463.46 3412.95,5465.39 v1(3428.07,5480.51) ; FPGA.AK31@3447.76,4437.21 3464.29,4420.67 v1@3464.29,4418.31 ; FPGA.C31@3447.76,5500.2 v1(3467.44,5519.88) 3468.35,5520.79 v1@3468.35,5523.43 ; FPGA.C32@3481.1,5496.18 3504.8,5519.88 v1(3506.81,5519.88) ; FPGA.AK32@3487.13,4437.21 3487.13,4436.85 v1@3507.4,4416.57 ; FPGA.V32@3487.13,4909.65 3487.13,4905.79 v1@3504.96,4887.95 ; FPGA.R32@3490.16,5028.94 3506.81,5045.59 v1(3506.81,5047.44) ; U1.4@3753,7223.5 3753.38,7223.12 C12.1@3842,7223.12 ; ARM.54@3998.59,6717.09 4034.5,6753 v1(4031,6756.5) ; v1(4022.38,4889.15) v1@4023.44,4890.21 ; v1(4022.38,5046.63) 4041.51,5027.5 FPGA1.A18@4042.26,5027.5 ; v1(4022.38,5519.07) 4039.15,5502.3 FPGA1.A30@4039.15,5501.16 ; v1@4022.81,4418.05 4041.16,4436.39 FPGA1.A3@4042.06,4436.39 ; v1@4024.54,4890.21 v1@4023.44,4890.21 ; FPGA1.A15@4039.62,4907.54 4039.62,4906.39 v1@4023.44,4890.21 ; ARM.42@4068.14,6956.51 4068.14,6956.36 4100.5,6924 v1(4100.5,6922) ; v1@4097.57,5559.35 4100.21,5559.35 v1(4101.12,5558.44) FPGA1.C31@4120.8,5538.76 ; v1(4101.12,4337.97) 4104.03,4337.97 FPGA1.C1@4122.93,4356.87 ; v1(4101.12,4377.34) 4120.41,4396.63 FPGA1.C2@4120.41,4398.32 ; v1(4101.12,4849.78) 4101.12,4852.89 FPGA1.C14@4115.33,4867.1 ; v1(4101.12,5086) 4120.8,5066.32 4121.59,5065.53 FPGA1.C19@4121.67,5065.53 ; v1(4101.12,5597.81) 4101.12,5595.8 FPGA1.C32@4124.82,5572.1 ; v1(4140.49,4416.71) 4140.8,4416.71 FPGA1.D3@4159.86,4435.76 ; v1(4140.49,4652.93) 4140.49,4654.58 FPGA1.D9@4157.81,4671.91 ; v1(4140.49,5282.85) 4144.07,5282.85 FPGA1.D24@4161.63,5265.29 ; v1(4140.49,5519.07) 4155.61,5503.95 FPGA1.D30@4157.54,5503.95 ; v1(4140.69,5165.8) 4140.9,5165.58 4174.58,5165.58 4196.01,5144.15 FPGA1.E21@4199.74,5144.15 ; v1(4179.86,4771.04) 4180.09,4771.04 FPGA1.E12@4200.29,4791.24 ; v1(4219.23,4495.45) 4221.55,4495.45 FPGA1.F5@4241.75,4515.65 ; v1(4219.23,5440.33) 4219.23,5436.71 FPGA1.F28@4233.99,5421.94 ; ARM.71@4235.17,6480.46 4268.5,6513.79 v1(4268.5,6520) ; ARM.28@4263.01,7151.38 4303.5,7110.89 v1(4303.5,7109.5) ; R43.2@4320,5761.53 v2(4353.5,5761.5) ; v2(4330.5,6190) 4368.47,6190 R49.2@4382,6176.47 ; v1(4337.34,4495.45) 4337.34,4497.45 FPGA1.J5@4357.57,4517.69 ; v1(4337.34,5440.33) 4352.46,5425.21 FPGA1.J28@4352.46,5418.24 ; R13.2@4442.47,6196 4442.47,6164.03 v2(4446,6160.5) ; v1(4449,6574.5) 4450.14,6574.5 ARM.84@4488.51,6536.14 ; v1@4455.33,4810.41 FPGA1.M13@4474.58,4829.66 ; v1(4455.45,4495.45) 4455.45,4497.22 FPGA1.M5@4473.36,4515.13 ; v1(4455.45,5440.33) 4471.87,5423.91 FPGA1.M28@4476.94,5423.91 ; v1(4455.57,5046.63) FPGA1.M18@4475.13,5027.06 ; v1(4456.39,4887.78) FPGA1.M15@4472.81,4904.2 ; v1@4458.2,5122.61 FPGA1.M20@4475.13,5105.69 ; v1(4458.52,4931.59) FPGA1.M16@4475.13,4948.21 ; ARM.19@4460.67,7095.7 ARM.19@4462,7095.7 ; ARM.19@4462,7099.5 4497.5,7135 4506.5,7135 4505,7135 v1(4504.5,7134.5) ; FPGA1.M17@4475.13,4987.58 v1(4495.88,4966.83) ; FPGA1.M18@4475.13,5026.95 FPGA1.M18@4475.13,5027.06 ; FPGA1.M18@4475.13,5030.69 FPGA1.M18@4475.13,5027.06 ; FPGA1.M18@4475.45,5026.75 FPGA1.M18@4475.13,5027.06 ; v1@4495.19,5164.37 FPGA1.N21@4514.5,5145.06 ; v1(4496.98,4772.93) 4513.83,4789.78 FPGA1.N12@4516.08,4789.78 ; v1(4534.19,4416.71) 4553.76,4436.28 FPGA1.P3@4553.76,4437.26 ; v1(4534.19,5519.07) 4534.19,5513.44 FPGA1.P30@4549.7,5497.93 ; ARM.13@4544.18,7012.18 4544.18,7018.94 4582,7056.76 4582,7064.5 v1(4583.5,7063) ; ARM.12@4558.1,6998.26 4601.5,7041.66 v1(4601.5,7046.5) ; v1(4573.56,4337.97) 4578.83,4337.97 FPGA1.R1@4595.72,4354.86 ; v1(4573.56,5597.81) 4575.41,5597.81 FPGA1.R32@4592.06,5581.16 ; v1@4575.88,5162.42 FPGA1.R21@4593.24,5145.06 ; v1@4577.34,4774.82 FPGA1.R12@4593.24,4790.72 ; v1(4612,6737.5) 4614.45,6737.5 4648.78,6703.17 ARM.96@4655.54,6703.17 ; v1@4618.2,5159.47 FPGA1.T21@4632.61,5145.06 ; v1@4619.43,4774.39 FPGA1.T12@4633.36,4788.32 ; ETHERNET.48@4631.73,6367.45 4631.73,6412.23 v2(4635.5,6416) ; FPGA1.T21@4632.5,5142.81 4636.99,5147.31 4644.13,5147.31 4661.06,5147.31 4663.31,5145.06 4671.98,5145.06 4687.82,5160.89 v1(4690.48,5160.89) ; v1(4653.72,4775.33) 4668.6,4790.21 FPGA1.U12@4672.18,4790.21 ; FPGA1.U30@4671.98,5499.39 4671.98,5500.21 v1@4692.18,5520.41 ; v1(4692.38,4772.52) FPGA1.V12@4708.8,4788.84 ; FPGA1.V1@4711.35,4357.65 v1@4730.65,4338.36 ; FPGA1.V21@4711.35,5145.06 v1@4732.43,5166.13 ; FPGA1.V32@4711.35,5578.13 4715.21,5578.13 v1@4733.05,5595.96 ; v2(4722.5,5886.5) 4790.48,5886.5 R19.1@4807.09,5903.11 ; FPGA1.W3@4750.72,4436.39 4750.72,4432.22 4759.27,4423.67 v1@4765.22,4423.67 ; FPGA1.W30@4750.72,5499.39 4751.83,5499.39 v1@4771.31,5518.87 ; FPGA1.Y21@4790.09,5145.06 v1(4809.39,5164.35) ; FPGA1.Y12@4792.18,4791.43 v1(4808.49,4775.12) ; FPGA1.AA5@4829.46,4515.13 4829.46,4513.91 v1@4849.27,4494.11 ; FPGA1.AA15@4829.46,4908.83 v1(4849.46,4888.83) ; FPGA1.AA16@4829.46,4948.21 v1@4849.25,4928.42 ; FPGA1.AA17@4829.46,4987.58 v1@4847.49,4969.55 ; FPGA1.AA18@4829.46,5026.95 v1(4849.35,5046.83) ; FPGA1.AA28@4829.46,5420.65 4829.46,5421.59 v1@4848.6,5440.72 ; FPGA1.AA20@4829.86,5104.35 4829.86,5105.95 v1(4847.73,5123.82) ; FPGA1.AA13@4830.76,4829.15 v1(4847.73,4812.18) ; L2.1@4846.46,5721.02 4923.74,5721.02 v2(4948.03,5745.31) ; ETHERNET.32@4899.45,6237.53 v2(4955,6237.5) ; FPGA1.AD5@4947.57,4515.13 4966.75,4495.96 v1@4967.85,4495.96 ; FPGA1.AD28@4947.57,5420.65 4956.55,5429.62 4957.02,5429.62 v1@4966.47,5439.07 ; v2(4974.5,6357.5) 4975,6358 R33.1@5001.53,6358 ; FPGA1.AF8@5026.31,4633.24 5045.84,4613.72 ; R51.2@5039.53,6200 5042.5,6200 v2(5066.5,6224) ; 5046,4613.72 5045.84,4613.72 ; v2@5064.96,6081.65 R14.2@5064.96,6125.55 ; FPGA1.AG5@5065.68,4515.13 5065.68,4512.61 v1@5084.35,4493.95 ; FPGA1.AG28@5065.68,5420.65 5083.91,5438.87 v1@5083.91,5441.94 ; v1@5086.43,4612.18 5084.9,4613.72 5045.84,4613.72 ; FPGA1.AH12@5105.05,4790.72 5105.05,4786.35 v1@5120.37,4771.04 ; FPGA1.AH21@5105.05,5145.06 5108.05,5145.06 v1@5126.79,5163.8 ; C21.1@5114,6129.5 5151.53,6167.03 R15.2@5151.53,6184 ; C21.1@5118.7,6124.92 C21.1@5118.7,6125.55 ; FPGA1.AJ3@5144.42,4436.39 v1(5164.11,4416.71) 5165.76,4415.05 v1@5165.76,4414.11 ; FPGA1.AJ9@5144.42,4672.61 5144.42,4668.68 v1@5163.4,4649.7 ; FPGA1.AJ24@5144.42,5263.17 5151.67,5263.17 v1@5170.13,5281.63 ; FPGA1.AJ30@5144.42,5499.39 5144.42,5501.39 v1@5165.8,5522.77 ; v2(5171.5,6019) 5194.5,6042 OSC1.4@5229.32,6042 ; FPGA1.AK1@5183.79,4357.65 5184.62,4357.65 v1@5203.32,4338.95 ; FPGA1.AK2@5183.79,4397.02 5183.79,4392.18 v1@5201,4374.98 ; FPGA1.AK14@5183.79,4869.46 5202.54,4850.72 v1@5202.54,4849.31 ; FPGA1.AK19@5183.79,5066.32 5199.82,5082.34 v1@5199.82,5082.73 ; FPGA1.AK31@5183.79,5538.76 5200.33,5555.29 v1@5202.69,5555.29 ; FPGA1.AK32@5183.79,5578.13 5184.15,5578.13 v1@5204.43,5598.4 ; FPGA1.AM3@5262.53,4436.39 5264.82,4436.39 v1@5279.27,4421.94 ; FPGA1.AM15@5262.53,4908.83 5281.59,4889.78 v1@5281.59,4885.29 ; FPGA1.AM18@5262.53,5026.95 5262.53,5027.14 v1@5282.77,5047.38 ; FPGA1.AM30@5262.53,5499.39 v1@5280.32,5517.18 ; v1@5278,5519.5 5284.07,5519.5 F_C62.1@5424,5379.57 5424,5250.5 F_C63.1@5421.5,5248 ; v1(5282,4729.5) 5282,4728.43 F_C65.1@5426,4584.43 ; v1@5282.5,4890 5282.5,4869.07 F_C64.1@5424,4727.57 ; C28.1@5320.44,6378 5320.44,6404.44 v2(5323,6407) ; OSC1.1@5394.68,6042 5413.18,6023.5 v2(5455,6023.5)
  Top Layer w20: U1.2@3238.19,7055.12 U1.4@3597.17,7055.12 ; v2(3564.5,5407.5) 3821.5,5407.5 3898.98,5330.02 ; U1.4@3583.86,7091.89 U1.4@3757.09,7091.89 ; U1.4@3614.17,6905.75 U1.4@3614.17,7055.12 3696.89,6972.4 v3@3696.89,6827.24 ; U1.4@3614.17,7023.27 U1.4@3663.46,6973.98 ; U1.4@3621.99,7011.22 U1.4@3708.25,6924.96 ; U1.4@3621.99,7023.27 U1.4@3621.99,7055.12 ; U1.4@3621.99,7047.98 U1.4@3671.28,6998.69 ; U1.4@3659.44,6973.98 3659.44,6826.65 U1.4@3659.44,7005.83 ; U1.4@3659.44,6974.11 U1.4@3659.44,7005.96 ; U1.4@3659.44,7007.54 U1.4@3692.87,6974.11 ; U1.4@3678.17,6851.23 U1.4@3702.3,6875.36 ; U1.4@3696.89,6949.54 U1.4@3696.89,6981.39 ; v3@3697.01,6826.93 v3@3697.28,6826.65 ; v3(3730.55,6828.66) U1.4@3730.55,6862.44 ; v2(3745.35,6017.17) 3752,6010.52 R42.2@3752,5979.53 ; v3(3764.09,6828.15) U1.4@3764.09,6860.79 ; 3902.5,5326.5 3898.98,5330.02 ; v1(4018.31,5210.81) 3899.1,5330.02 3898.98,5330.02
  Top Layer w25: v2(2126.06,4356.05) F_C22.1@2126.06,4422.24 ; v2(4549.96,6027.13) C19.1@4582.68,6027.13 ; C20.1@4755.91,5790.91 v2(4788.62,5790.91) ; R16.2@5068.9,6042.87 v2(5068.9,6075.59) ; C21.1@5118.11,6125.55 v2(5150.83,6125.55)
  Bottom Layer w6: v2(2110.23,5334.64) 2140.32,5304.54 2264.53,5304.54 2282.82,5322.83 v1@2283.46,5322.83 ; H1.4@2127.95,6023.62 H1.4@2128.03,6023.7 ; H1.4@2128.03,6018 H1.4@2128.03,6023.7 ; H1.6@2128.78,6115.24 2128.03,6114.49 H1.4@2128.03,6023.7 ; H1.4@2129.45,6019.69 H1.4@2130.67,6020.91 ; H1.6@2130,6118 2152.94,6118 2191.47,6156.53 2194.86,6156.53 ; R44.1@2178.47,6378 R44.1@2179.54,6378 ; R44.1@2180.32,6378.78 R44.1@2179.54,6378 ; v1(2248.35,5442.4) 2263.03,5442.4 2288.19,5417.24 2305.67,5417.24 F_C25.4@2305.91,5417.01 ; R37.1@2256,4252.47 2256,4267.3 2229.28,4294.02 2229.28,4329.03 2255.88,4355.63 v1(2263.7,4355.63) ; v1(2283.55,5323.02) 2283.81,5322.76 F_C25.1@2307.59,5322.76 ; v1(2285.08,5361.22) 2292.05,5354.25 F_C25.2@2307.59,5354.25 ; v1(2286.34,5400.16) 2300.75,5385.75 F_C25.3@2307.59,5385.75 ; R45.1@2301.1,6169.25 2288.38,6156.53 2194.86,6156.53 ; v1(2363.09,4733.28) 2371.56,4741.75 F_C24.3@2383.59,4741.75 ; v1(2363.54,4416.81) 2363.54,4414.8 F_C27.4@2380.76,4397.59 ; v1(2363.65,4694.47) 2379.43,4710.25 F_C24.2@2383.59,4710.25 ; v1(2365.06,4656.53) 2365.06,4660.23 F_C24.1@2383.59,4678.76 ; v1(2365.94,4773.07) 2366.12,4773.24 F_C24.4@2383.59,4773.24 ; H2.10@2378.5,6324.49 2298.28,6404.72 2220.02,6404.72 2193.3,6378 R44.1@2179.54,6378 ; R41.1@2403.53,5540 2383.86,5559.67 2383.86,5627.5 2399.55,5643.19 2399.55,5658.93 2442.53,5701.91 2442.53,5757.96 2389.46,5811.02 2383.86,5811.02 2383.86,5820.79 H2.1@2483.07,5920 ; v1(2404.46,4414.73) 2404.46,4412.7 2412.25,4404.91 F_C27.3@2412.25,4397.59 ; R41.1@2408.7,5535.2 2408.7,5530.83 2425.95,5513.57 ; v1(2441.03,4417.49) 2443.75,4414.77 F_C27.2@2443.75,4397.59 ; v1(2445.6,5518.88) 2440.29,5513.57 2425.95,5513.57 ; R40.1@2448,5491.53 2425.95,5513.57 ; F_C27.1@2475.24,4397.59 2475.24,4411.15 v1(2483.78,4419.69) ; H2.1@2484,5918 2482.54,5919.46 2422.53,5979.47 2323.01,5979.47 2245.96,6056.53 2160.86,6056.53 H1.4@2128.03,6023.7 ; R39.1@2555.94,5342.05 2582.05,5342.05 2584.79,5344.79 2584.79,5370.56 2595.92,5381.69 2621.69,5381.69 2680.04,5440.04 v1(2680.04,5441.14) ; v1@2674.5,4934.83 2674.5,4957.45 v1(2684.33,4967.28) ; v1(2681.93,5124.02) 2699.04,5106.91 2699.04,5061.4 v1(2683.39,5045.75) v1(2683.39,5011.3) v1@2683.39,4968.23 ; v1@2682.32,5124.02 v1@2717.97,5159.66 ; v1(2684.12,4812.51) 2683.27,4811.65 2681.26,4811.65 2702.06,4790.85 2720.53,4790.85 ; v1(2717.97,5164.24) 2735.65,5146.55 2778.72,5146.55 v1(2796.78,5164.61) ; v1(2721.18,4773.27) v1@2721.18,4773.5 ; v1@2721.38,4772.13 2720.53,4772.97 2720.53,4790.85 ; v1@2797.99,5164.34 2816.22,5146.11 v1@2832.6,5162.48 ; 2817.15,5145.18 2817.15,5119.69 2829.65,5107.18 2876.16,5107.18 ; v1@2876.16,5124.35 2876.16,5107.18 ; v1@2955.28,5164.45 2973.17,5146.55 3014,5146.55 v1@3030.54,5163.09 ; v1@2955.57,5165.49 2936.63,5146.55 2936.63,5119.68 2924.13,5107.18 2876.16,5107.18 ; v1@2955.63,4771.42 2967.7,4771.42 2987.13,4790.85 3015.24,4790.85 ; v1(2955.83,4771.65) 2945.94,4771.65 2925.4,4792.19 2909.5,4792.19 2888.97,4771.65 2796.97,4771.65 2777.78,4790.85 2720.53,4790.85 ; v1(3032.82,4773.27) 3015.24,4790.85 ; 3034.92,5152.83 3061.81,5125.94 ; 3053.46,4830.75 3072.6,4811.61 v1(3073.35,4811.61) ; v1(3069.89,4930.52) 3073.03,4927.37 3073.03,4887.6 v1@3074.29,4886.34 ; v1@3072.24,5010.33 v1@3072.24,5045.35 ; 3073.07,5060.61 3054.74,5078.94 3054.74,5107.46 v1(3073.23,5125.94) ; v1@3073.74,5047.44 3073.74,5059.27 ; 3075.16,4871.14 v1@3075.16,4886.34 ; 3094.84,4869.59 3065.87,4869.59 3053.37,4857.09 3053.37,4799.43 3044.79,4790.85 3015.24,4790.85 ; 3096.21,4870.96 3157.53,4870.96 3172.85,4886.28 3172.85,4937.2 3189.13,4953.48 3189.13,4967.24 3210.85,4988.96 3210.85,5024.75 3233.12,5047.02 ; 3233.56,5047.02 3233.12,5047.02 ; v1(3268.86,5164.51) 3291.62,5141.75 F_C23.3@3293.59,5141.75 ; v1(3270.08,5124.49) 3279.35,5124.49 F_C23.2@3293.59,5110.25 ; v1@3270.73,5047.02 3233.12,5047.02 ; v1(3272.6,5558.47) 3274.76,5556.32 F_C26.1@3274.76,5536.41 ; v1(3273.31,4417.45) 3276.76,4414.01 F_C28.4@3276.76,4397.59 ; F_C23.1@3293.59,5078.76 3304.65,5078.76 v1(3311.33,5085.44) ; F_C23.4@3293.59,5173.24 3293.59,5141.57 v1(3310,5125.16) ; F_C26.2@3306.25,5536.41 3306.25,5554.68 v1(3310,5558.43) ; F_C28.3@3308.25,4397.59 3308.25,4413.23 v1(3312.63,4417.61) ; F_C26.3@3337.75,5536.41 3337.75,5548.26 v1(3349.72,5560.24) ; F_C28.2@3339.75,4397.59 3339.75,4391.25 v1@3349,4382 ; v1(3349.33,4380.97) v1@3349.33,4382 ; F_C26.4@3369.24,5536.41 3388.23,5555.39 v1(3388.23,5558.82) ; F_C28.1@3371.24,4397.59 3371.24,4396.76 v1@3387,4381 ; v1(3506.81,5047.44) 3506.81,5083.58 OSC3.4@3559.06,5135.83 ; OSC3.4@3567.32,5146 3716.2,5146 OSC3.1@3720.47,5141.73 ; v2(3987.5,6397) 3992.5,6392 VCC.1@4022,6392 ; v1@4025.5,4416.5 4045.47,4436.47 R54.1@4058,4436.47 ; A_C12.1@4054.51,6789.49 4077.5,6812.47 v1(4077.5,6813) ; v1(4060.76,5440.72) 4072.74,5428.75 F_C45.3@4084.59,5428.75 ; v1(4062.18,5479.23) 4065.61,5479.23 F_C45.4@4084.59,5460.24 ; v1@4062.53,5363.6 4064.68,5365.76 F_C45.1@4084.59,5365.76 ; v1(4062.57,5401) 4066.32,5397.25 F_C45.2@4084.59,5397.25 ; A_C6.1@4120.51,6878.51 4132.49,6878.51 4149.5,6861.5 v1(4147,6859) ; v1@4143.5,4648.5 4174,4618 R53.1@4174,4599.53 ; v1(4178.6,4339.35) 4178.6,4354.03 4203.76,4379.19 4203.76,4396.67 F_C47.4@4203.99,4396.91 ; v1(4179.86,4771.04) 4180.96,4771.04 4239.31,4712.69 4239.31,4686.92 4250.44,4675.79 4276.21,4675.79 4278.95,4673.05 4278.95,4646.94 4291.45,4646.94 4339.5,4598.89 R52.1@4339.5,4589.5 ; v1@4182,4771.5 4194.03,4783.53 R50.1@4284,4783.53 ; v1(4220.84,4377.34) 4235.25,4391.75 F_C47.3@4235.25,4398.59 ; v1@4259.78,4376.08 4266.75,4383.05 F_C47.2@4266.75,4398.59 ; v1@4260,4415.5 v1@4261.5,4415.5 ; v1(4260,4417) v1@4261.5,4415.5 ; A_C8.1@4282.51,6565.49 4283.99,6565.49 v1(4306,6587.5) ; F_C47.1@4298.24,4398.59 4281.33,4415.5 v1@4261.5,4415.5 ; A_C9.1@4321.49,7083.49 4321.49,7049.01 4324.5,7046 v1(4328,7049.5) ; F_C46.4@4447.76,5384.59 4477.91,5384.59 4478,5384.5 F_C46.3@4478,5384.59 ; v1@4455.51,5046.57 4474.45,5027.63 4501.32,5027.63 4513.82,5015.13 4513.82,4967.16 ; v1(4456.39,4887.78) 4474.45,4869.72 4474.45,4826.65 v1@4456.76,4808.97 ; v1@4456.55,5046.28 4474.45,5064.17 4474.45,5105 v1@4457.91,5121.54 ; v1@4456.66,4888.99 4474.89,4907.22 v1@4458.52,4923.6 ; v1@4461.34,4808.97 v1@4496.98,4773.32 ; v1(4464,6916.5) 4464,6919.03 A_C10.1@4485.49,6940.51 ; v1@4468.17,5125.92 4495.06,5152.81 ; v1@4474.5,5420.5 4479.25,5415.75 F_C46.3@4479.25,5384.59 ; v1(4474.5,5421) v1@4475.84,5421 ; 4475.82,4908.15 4501.31,4908.15 4513.82,4920.65 4513.82,4967.16 ; v1@4479.25,5420 4479.25,5463.75 v1(4495,5479.5) ; v1(4495.06,5164.23) 4513.54,5145.74 4542.06,5145.74 4560.39,5164.07 ; v1@4496.65,4967.16 4513.82,4967.16 ; v1(4496.98,4772.93) 4514.09,4790.04 4559.6,4790.04 v1(4575.25,4774.39) v1(4609.7,4774.39) v1@4652.77,4774.39 ; F_C46.2@4510.75,5384.59 4517.09,5384.59 v1@4532.5,5400 ; v1@4535.56,5402.33 4542.24,5395.65 F_C46.1@4542.24,5384.59 ; F_C46.1@4543,5384 4573.98,5353.02 4573.98,5324.12 ; v1(4554.5,6784) 4565.01,6773.49 A_C11.1@4589.49,6773.49 ; 4561.73,5164.74 v1@4573.56,5164.74 ; 4573.98,5324.56 4573.98,5324.12 ; v1@4575.65,5163.24 v1@4610.67,5163.24 ; v1(4653.72,4775.33) 4663.55,4765.5 v1@4686.17,4765.5 ; v1(4690.48,5160.89) 4693.63,5164.03 4733.4,5164.03 v1@4734.66,5165.29 ; v1@4734.66,5166.16 4749.86,5166.16 ; 4750.04,5187.21 4750.04,5248.53 4734.72,5263.85 4683.8,5263.85 4667.52,5280.13 4653.76,5280.13 4632.04,5301.85 4596.25,5301.85 4573.98,5324.12 ; 4751.41,5185.84 4751.41,5156.87 4763.91,5144.37 4821.57,5144.37 4830.15,5135.79 4830.15,5106.24 ; 4790.25,5144.46 4809.39,5163.6 v1(4809.39,5164.35) ; L4.1@4806.51,7044.5 4806.51,7079.01 v2(4835,7107.5) ; v1(4808.49,4775.12) 4809.35,4774.27 4809.35,4772.26 4830.15,4793.06 4830.15,4811.53 ; v1@4847.5,4812.18 v1(4847.73,4812.18) ; F_C48.4@4847.76,4474.59 4847.76,4457.12 v1(4847.93,4456.94) ; v1(4847.73,5123.82) 4830.15,5106.24 ; v1@4848.87,4812.38 4848.03,4811.53 4830.15,4811.53 ; v1(4849.35,5046.83) 4849.35,5036.94 4828.81,5016.4 4828.81,5000.5 4849.35,4979.97 4849.35,4967.55 4849.35,4887.97 4830.15,4868.78 4830.15,4811.53 ; v1@4849.58,5046.63 4849.58,5058.7 4830.15,5078.13 4830.15,5106.24 ; F_C48.3@4879.25,4474.59 4879.25,4462.56 v1(4887.72,4454.09) ; F_C48.2@4910.75,4474.59 4910.75,4470.43 v1(4926.53,4454.65) ; A_C7.1@4930,6662.44 4950.5,6641.94 v2(4950.5,6631.5) ; F_C48.1@4942.24,4474.59 4960.77,4456.06 v1(4964.47,4456.06) ; v2(4958,6605) 4975.05,6622.05 C27.2@4988.19,6622.05 ; v2(4960.63,6454.72) 4962,6456.09 R23.1@4962,6484.47 ; R10.2@5006.47,6302 5008.47,6300 v2(5035.5,6300) ; R24.2@5066,6500.47 5076,6510.47 v2(5076,6529.5) ; v1(5201.31,4574.78) 5209.85,4566.24 F_C49.1@5223.41,4566.24 ; v1(5203.39,5403.63) 5207.77,5399.25 F_C50.3@5223.41,5399.25 ; v1@5203.5,4333.5 5201.75,4333.5 5165.69,4297.44 5165.69,4254.56 5183.78,4236.47 R55.1@5296,4236.47 ; v1@5203.51,4532.03 5206.23,4534.75 F_C49.2@5223.41,4534.75 ; v1@5203.55,5364.31 5206.99,5367.76 F_C50.4@5223.41,5367.76 ; v1(5204.19,4454.54) 5206.2,4454.54 F_C49.4@5223.41,4471.76 ; v1@5206.27,4495.46 5208.3,4495.46 5216.09,4503.25 F_C49.3@5223.41,4503.25 ; F_C50.2@5223.41,5430.75 5215.31,5430.75 5203.22,5442.84 5205.7,5440.33 v1(5240.03,5440.33) ; F_C50.1@5223.41,5462.24 5204.61,5481.04 5204.07,5481.04 5205.41,5479.7 5240.03,5479.7 5259.98,5499.65 v1(5262.39,5499.65) ; R44.1@2179.54,6378 2168.53,6366.99 2168.53,6182.86 2194.86,6156.53
  Bottom Layer w20: v1@3467.8,5402.87 3515.32,5402.87 3544.49,5432.05 ; v2(3564.5,5407.5) 3564.5,5412.04 3544.49,5432.05 ; 3739.87,5554.94 3739.87,5830.86 3735,5835.73 3735,5857.27 3739.87,5862.14 3739.87,6047.34 3736.5,6050.71 3736.5,6318.08 3764.65,6346.23 3764.65,6495.94 ; 3740.86,5549.96 3709.87,5518.98 3582.52,5518.98 3544.49,5480.95 3544.49,5432.05 ; 3764.09,6496.49 v3(3764.09,6828.15)
  Bottom Layer w25: v2(2126.06,4356.05) 2126.06,4389.84 2135.83,4399.61 ; 2134.02,4401.41 2139.26,4406.65 2235.35,4406.65 v1@2244.49,4415.79 ; v2(5232.28,6711.38) C41.2@5232.28,6744.09 ; v2(5277.56,6821.61) R22.2@5277.56,6854.33 ; v2(5277.56,6923.97) R21.1@5277.56,6956.69 ; v2(5334.65,6770.43) C26.2@5334.65,6803.15
  other v1: 4731.04,4337.97 5203.48,4337.97 2325.71,4338.78 2798.15,4338.78 2955.63,4338.78 4259.5,4376 5203.48,4377.34 3388.7,4380.97 4022.38,4416.71 4770.41,4416.71 5282.22,4416.71 2246.97,4417.52 2286.34,4417.52 2758.78,4417.52 2995,4417.52 3467.44,4417.52 3506.81,4417.52 2561.93,4456.89 3191.85,4456.89 3428.07,4456.89 4849.15,4495.45 4967.26,4495.45 5085.37,4495.45 2680.04,4496.26 3073.74,4496.26 5206,4495.5 5203.5,4533.5 2521.65,4535.24 2404.45,4535.63 3349.33,4535.63 5085.76,4612.65 5164.11,4652.93 2404.45,4653.74 3349.33,4653.74 5124.74,4771.04 2404.45,4771.85 3349.33,4771.85 2835.66,4773.51 2876.55,4773.51 4456.5,4810 5203.48,4849.78 2325.71,4850.59 3428.07,4850.59 5282.22,4889.15 2246.97,4889.96 3506.81,4889.96 4847.49,4926.66 3428.07,4929.33 4847.49,4967.55 3068.47,5006.56 3071.42,5045.35 5282.22,5046.63 3270.63,5048.11 5203.48,5086 4461,5123 4614.44,5159.47 4575.65,5162.42 3034.71,5163.09 5124.74,5164.74 4731.5,5165.5 5164.11,5282.85 4062,5364 5203,5364 3468.43,5402.4 4534,5402 4849.15,5440.33 4967.26,5440.33 5085.37,5440.33 4691.67,5519.07 4770.41,5519.07 5164.11,5519.07 5282.22,5519.07 5203.48,5558.44 4731.04,5597.81 5203.48,5597.81 2325.71,5598.62
  other v3: 3663.46,6826.65 3697.01,6826.65 3501.97,6980.31 3716.54,7043.31 3484.25,7045.28 3604.33,7045.28 3484.25,7149.61 3604.33,7149.61 3712.6,7149.61 3602.36,7228.35 3710.63,7228.35 3484.25,7230.31